# Altium PCB NearFieldProbeSet.PcbDoc (part 1 of 3)
Units mm, origin at the board's own origin, x right, y up, seen from the top; angles counter-clockwise.
Board outline 100 x 100 mm, 6 copper layers (Top Layer, Int1, Int2 (SIG), Int3, Int4, Bottom Layer), stack 1.538 mm thick; 8 components, 12 nets, 232 pads, 4318 vias.
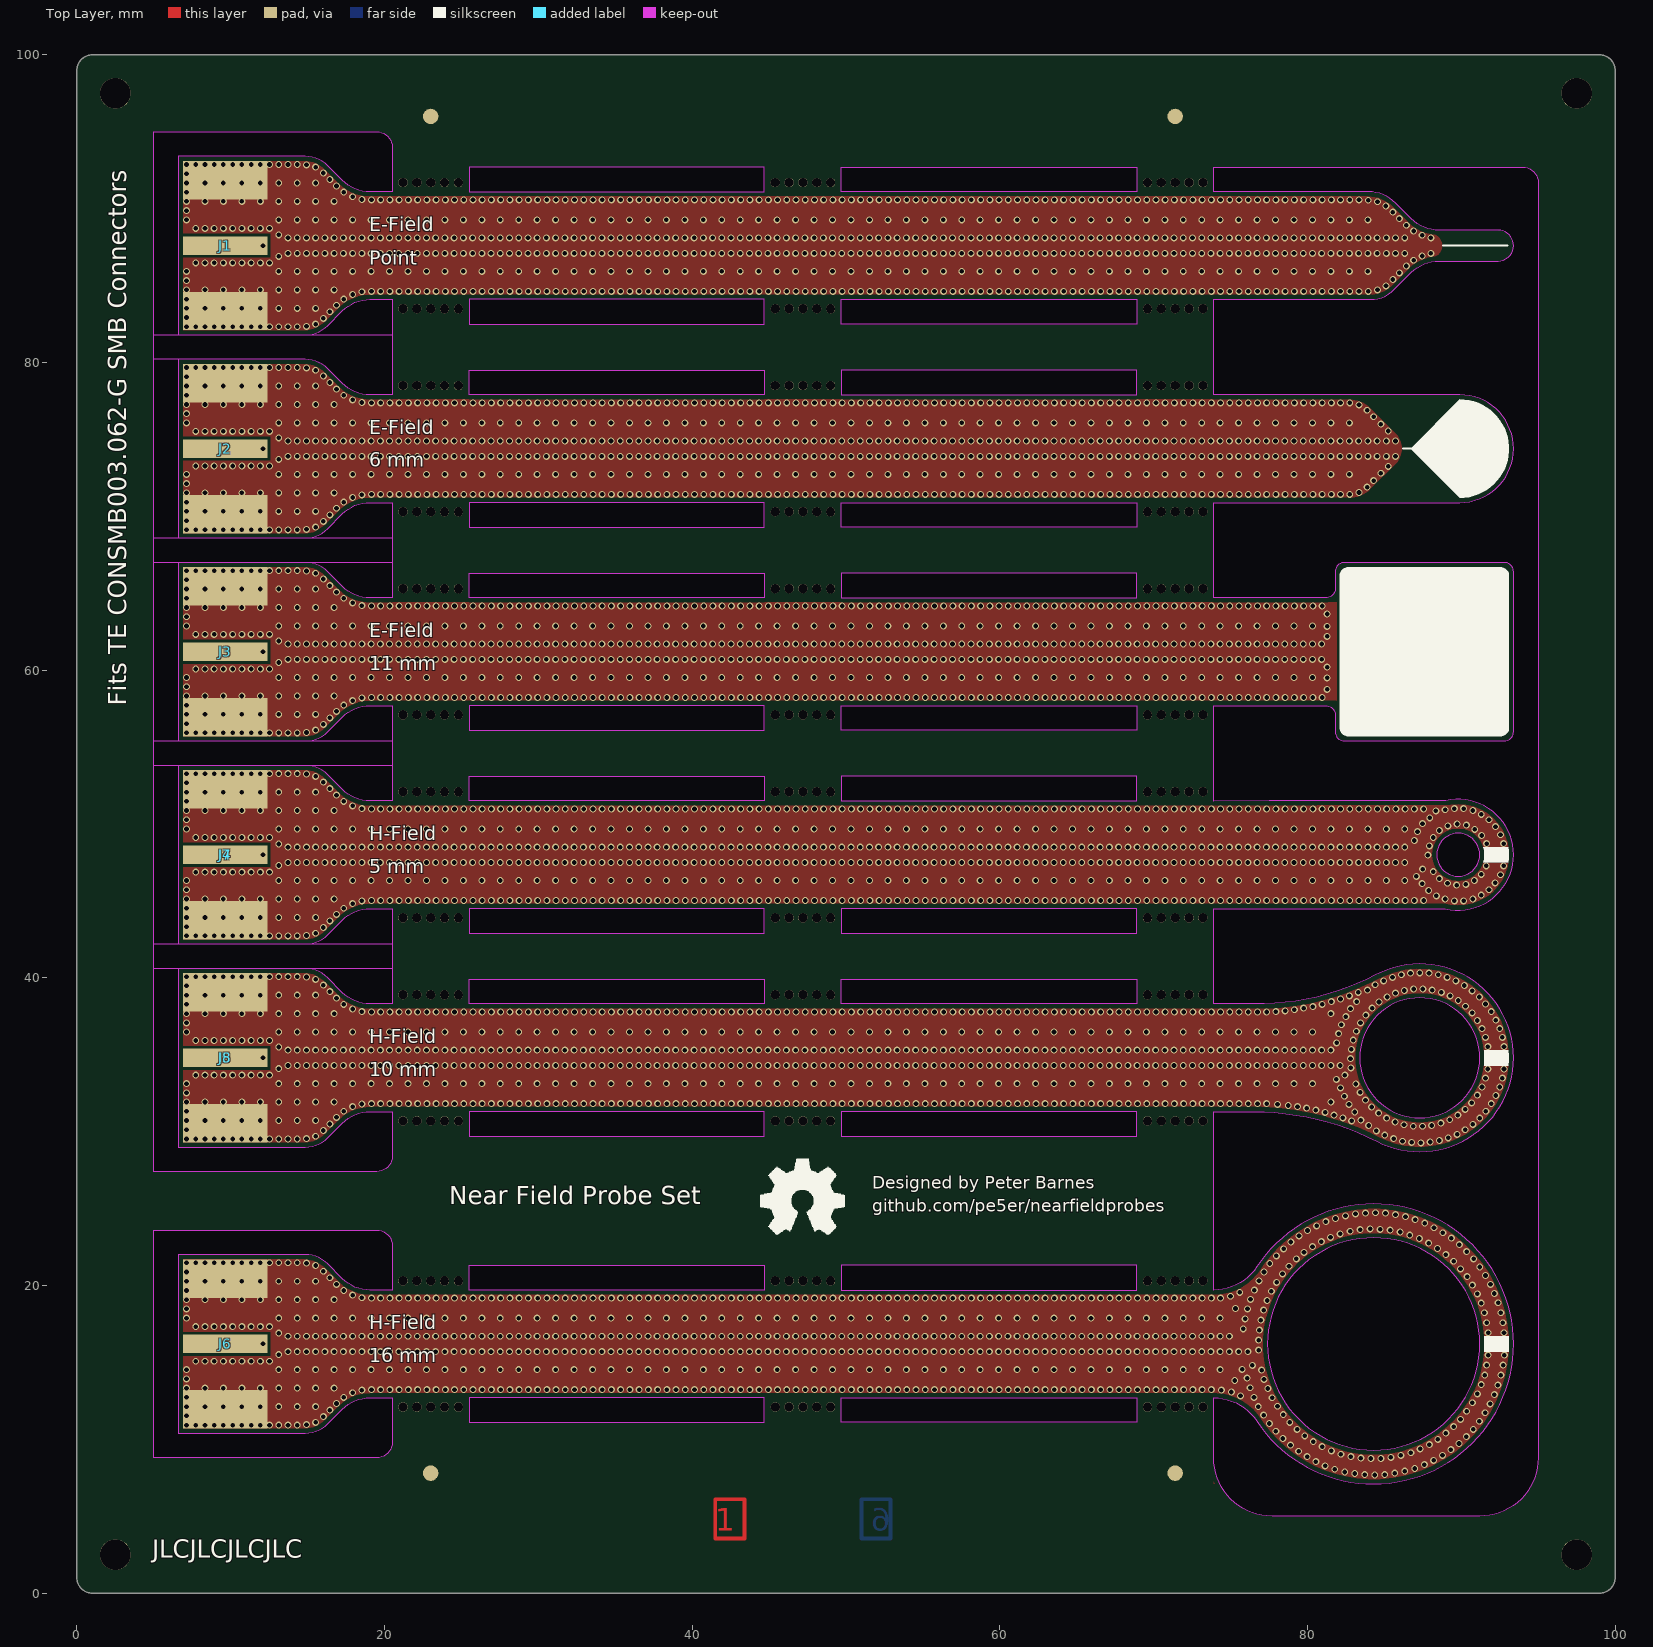
[diagram p0: Top Layer view]
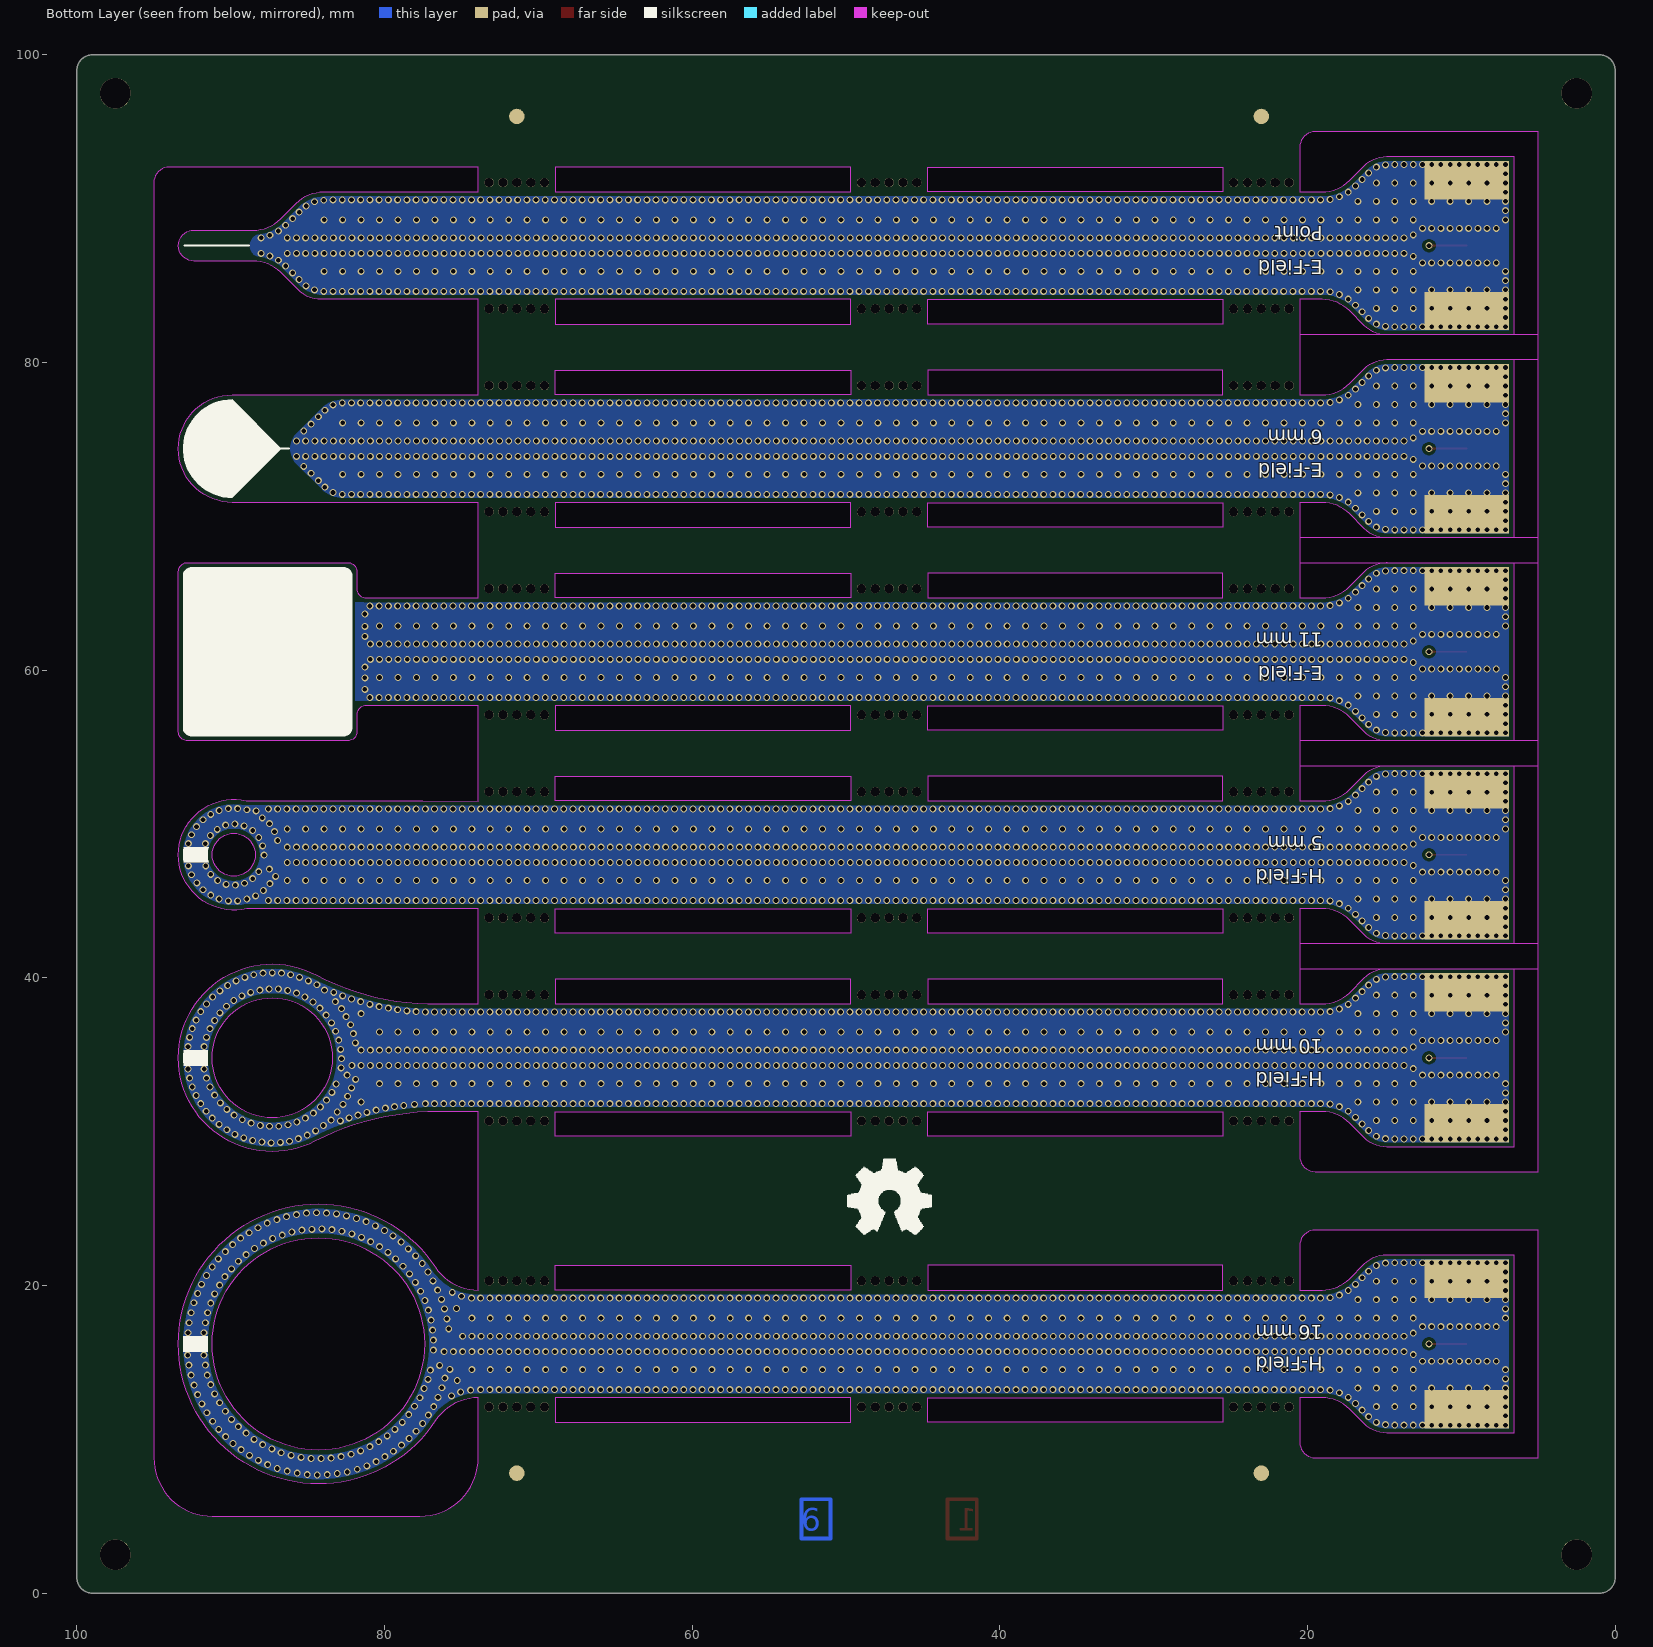
[diagram p1: Bottom Layer view, seen from below]
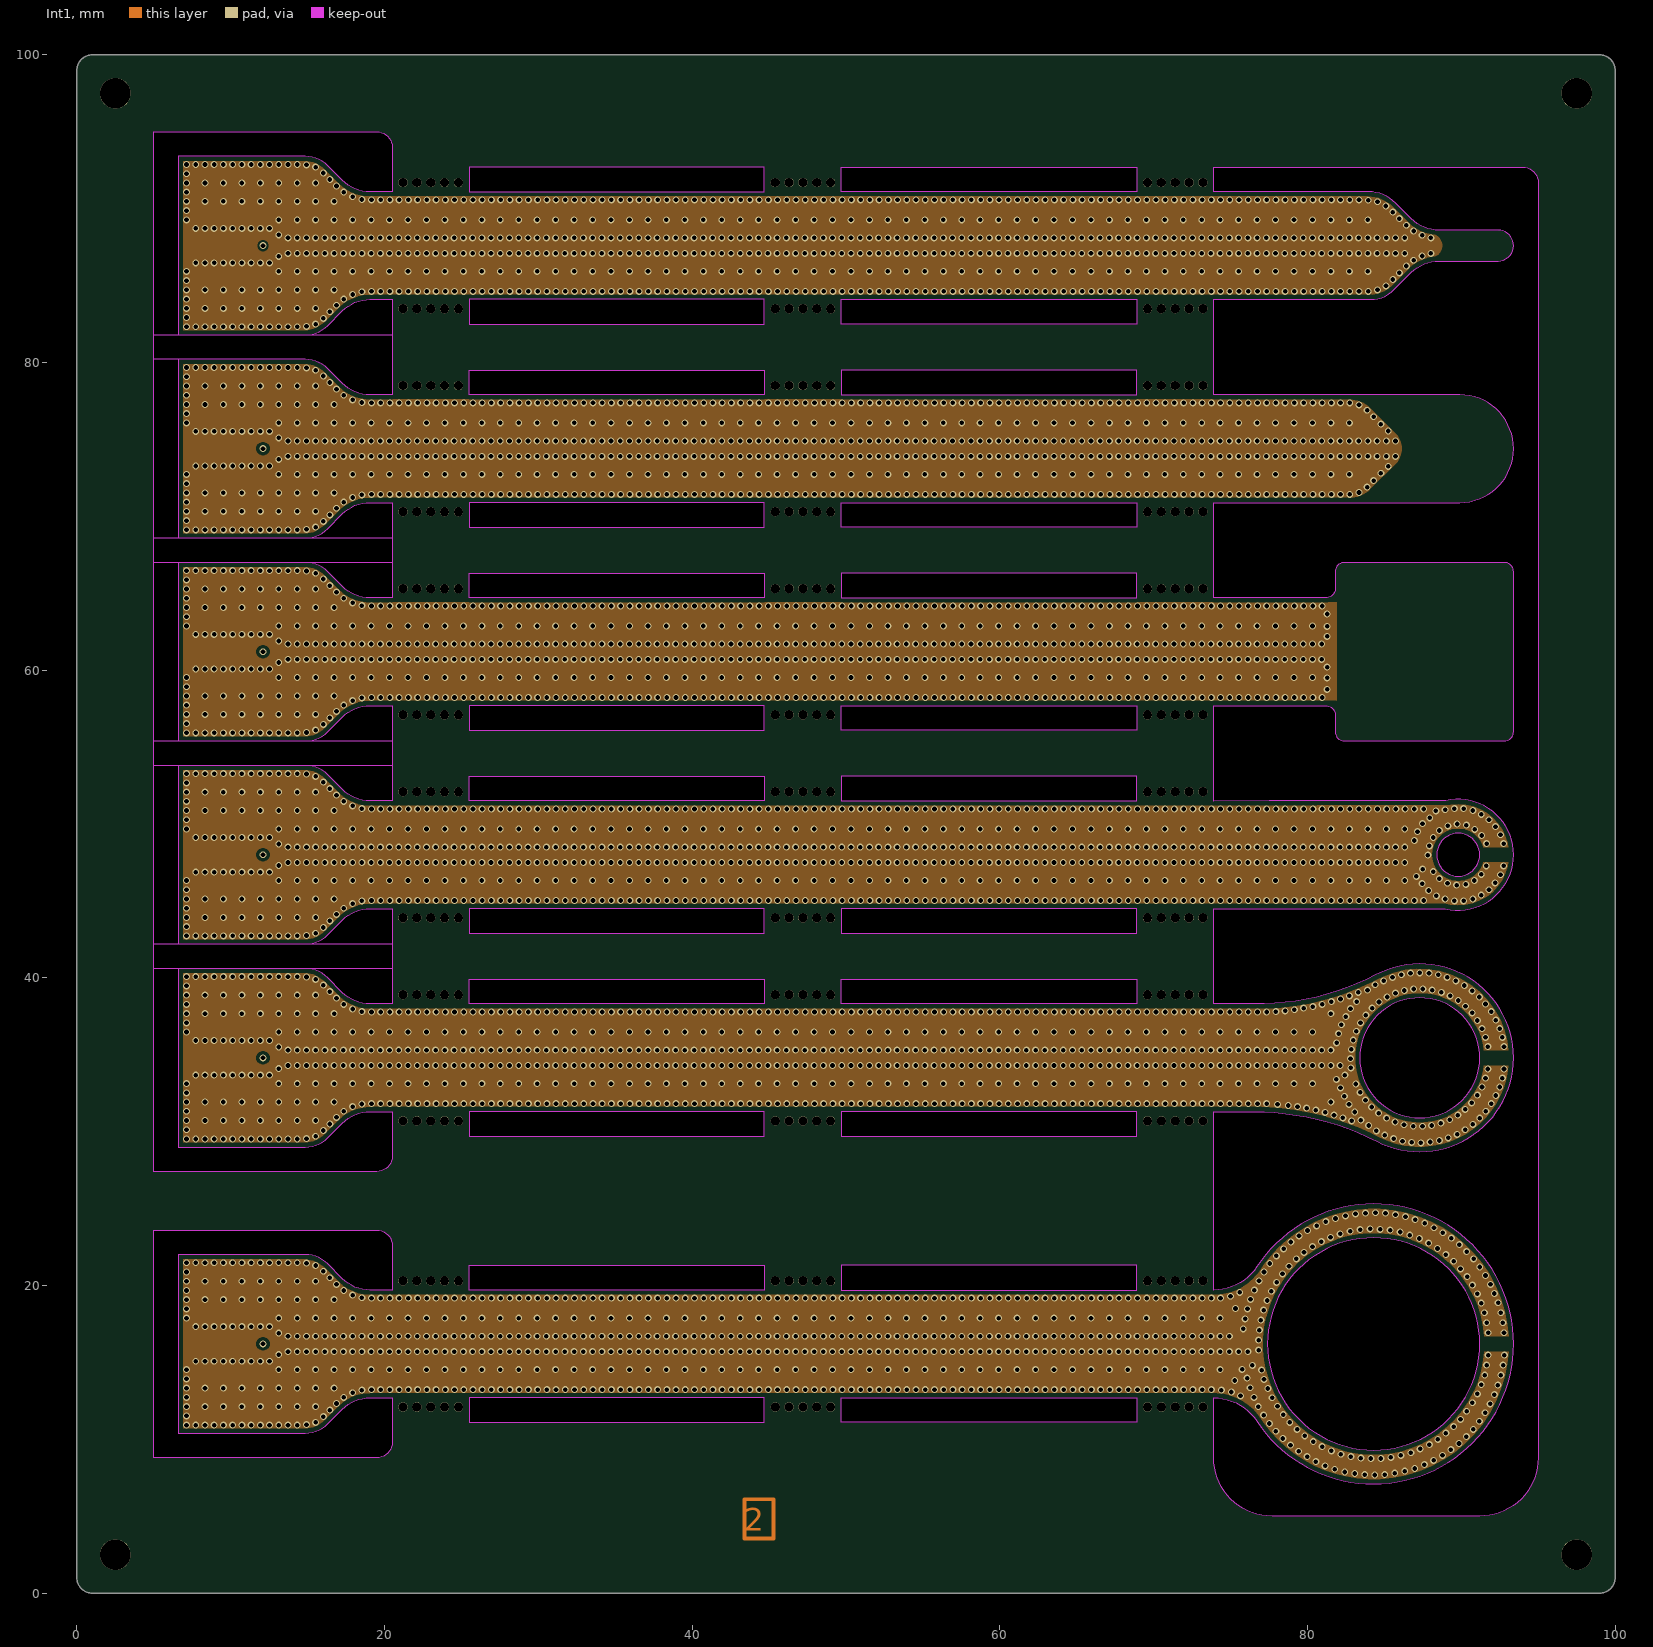
[diagram p2: Int1]
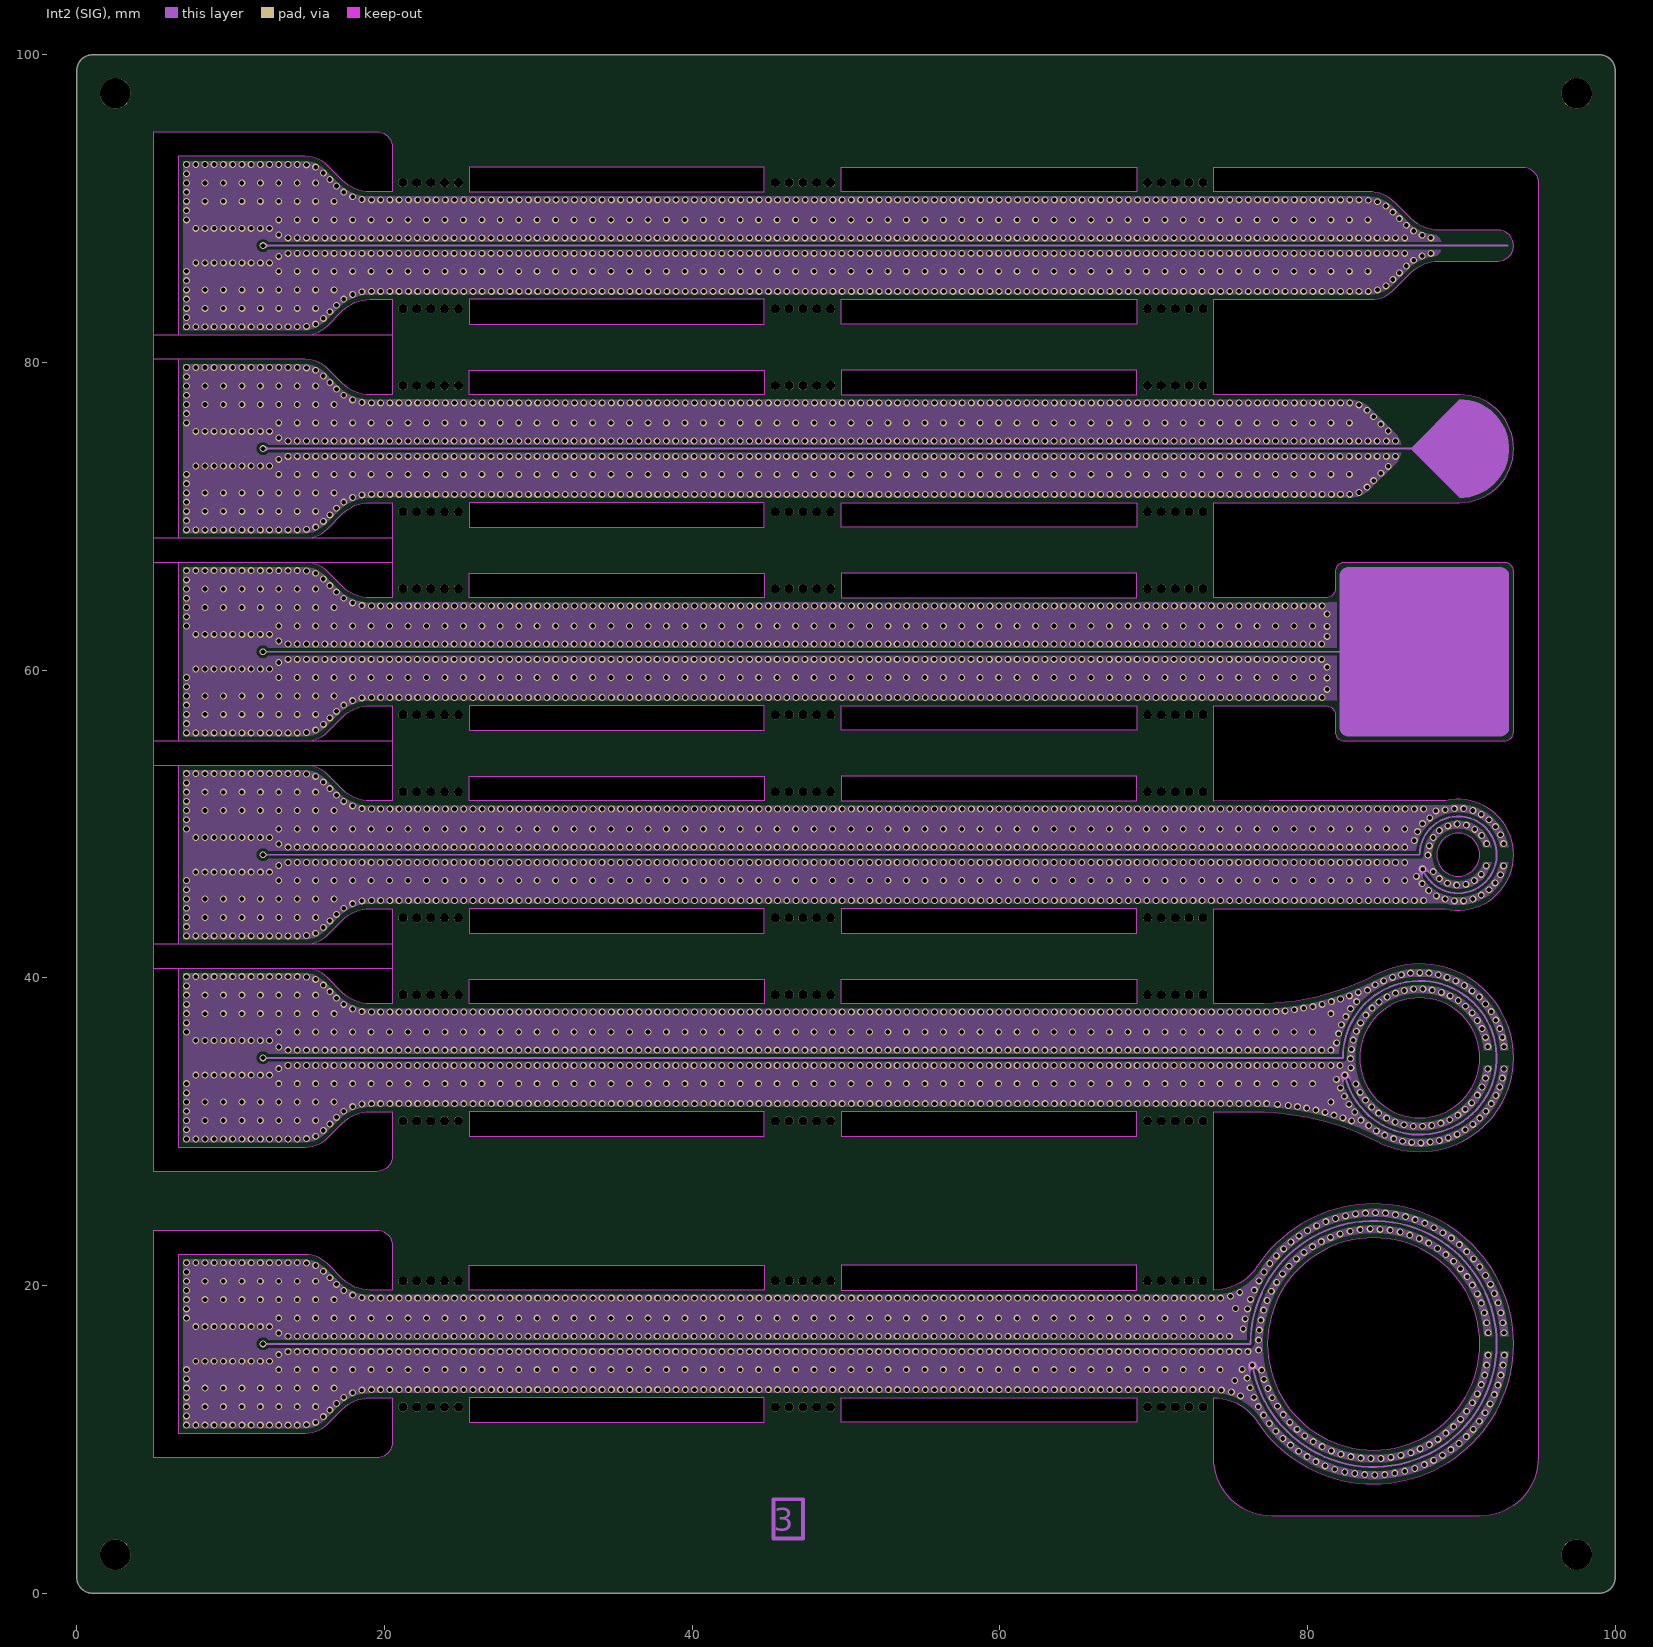
[diagram p3: Int2 (SIG)]
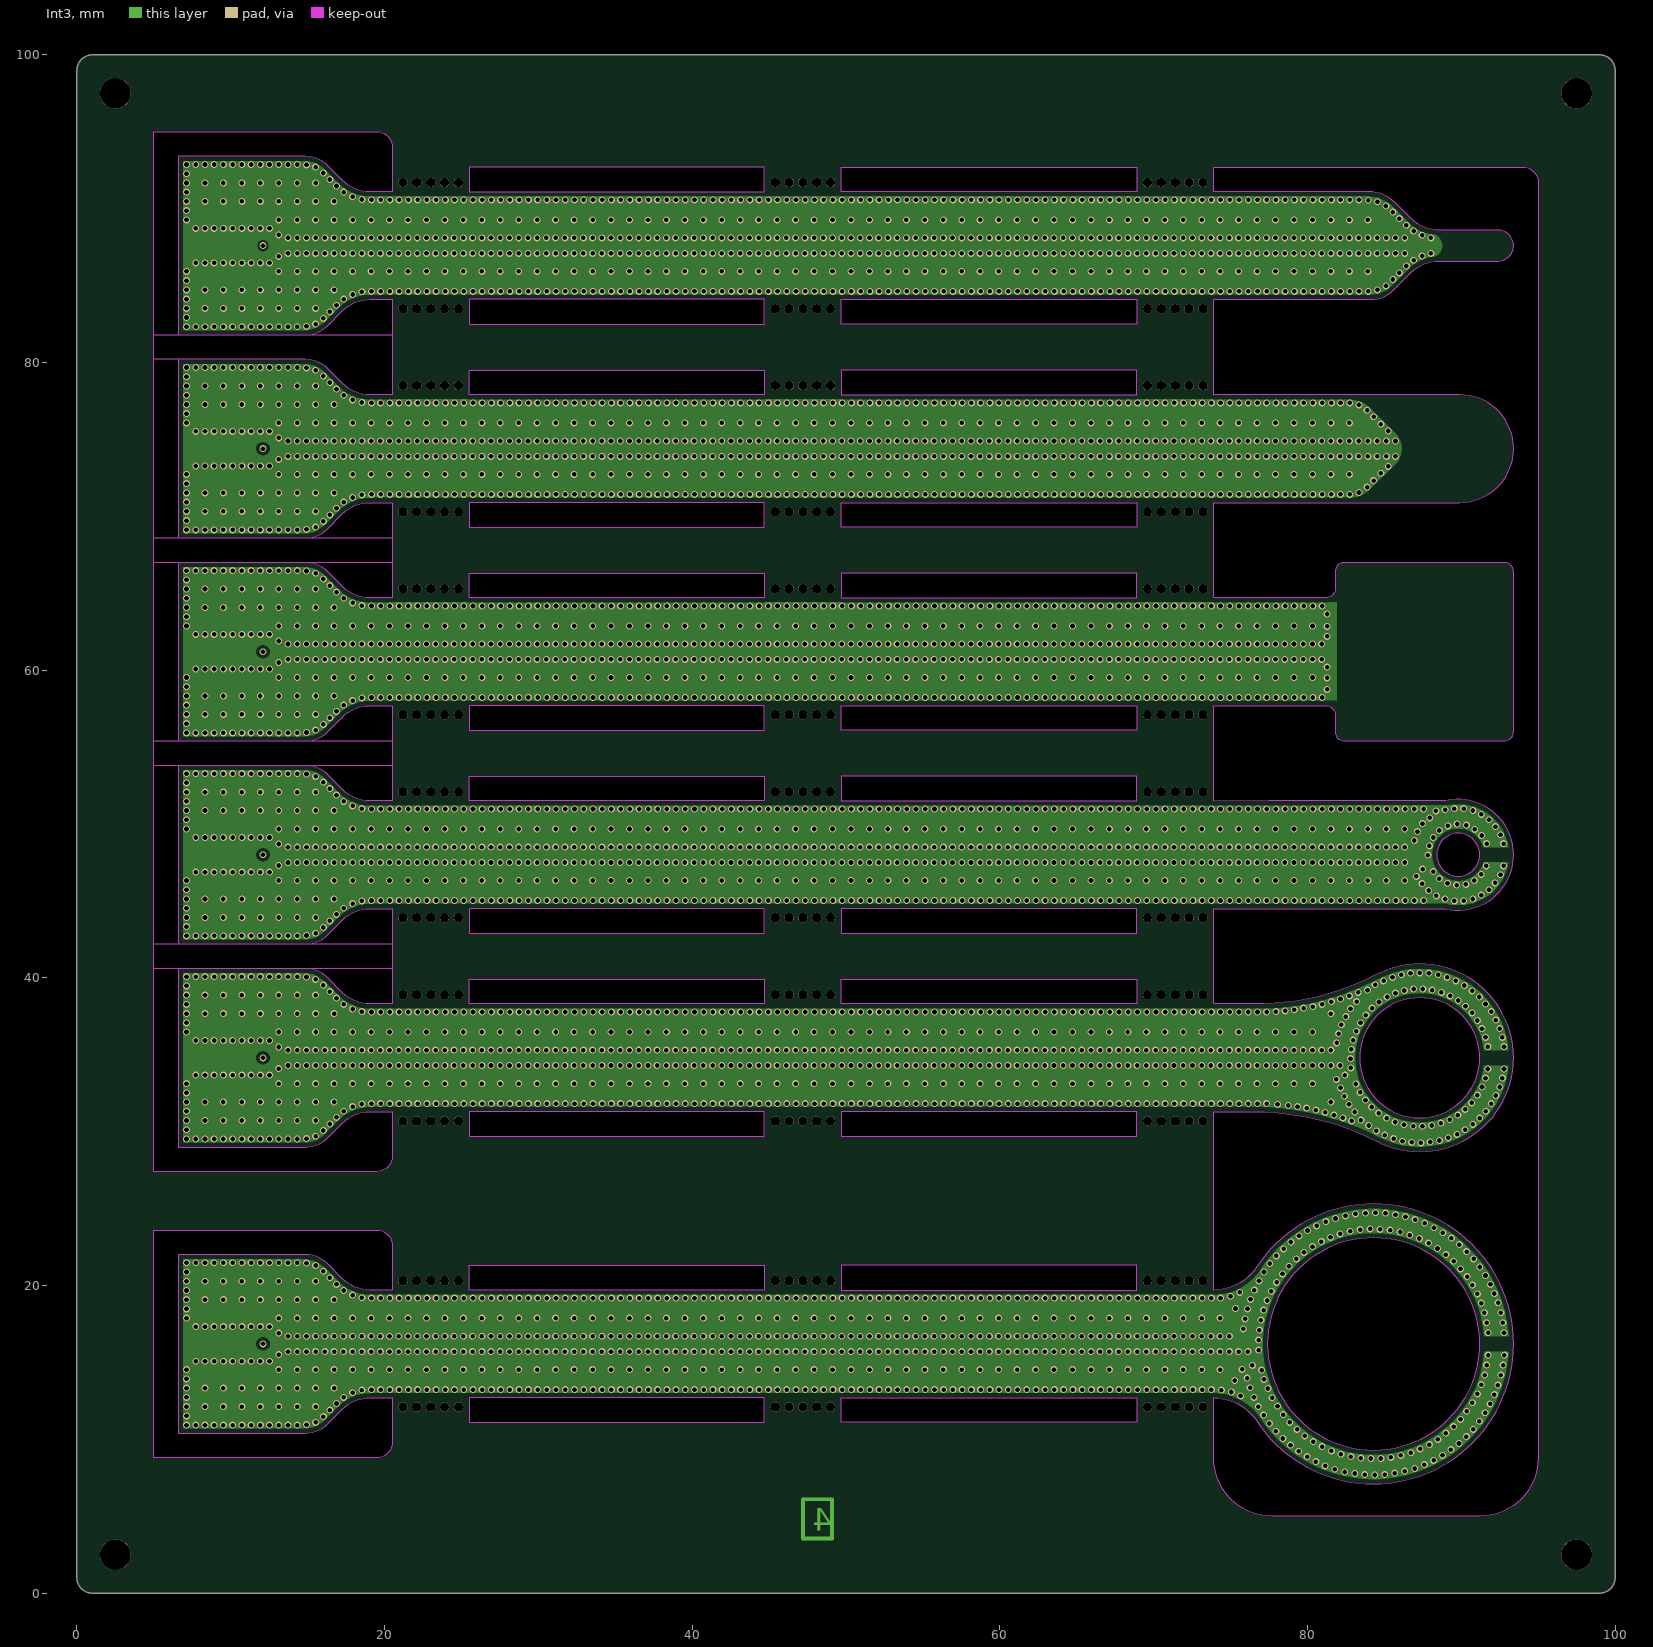
[diagram p4: Int3]
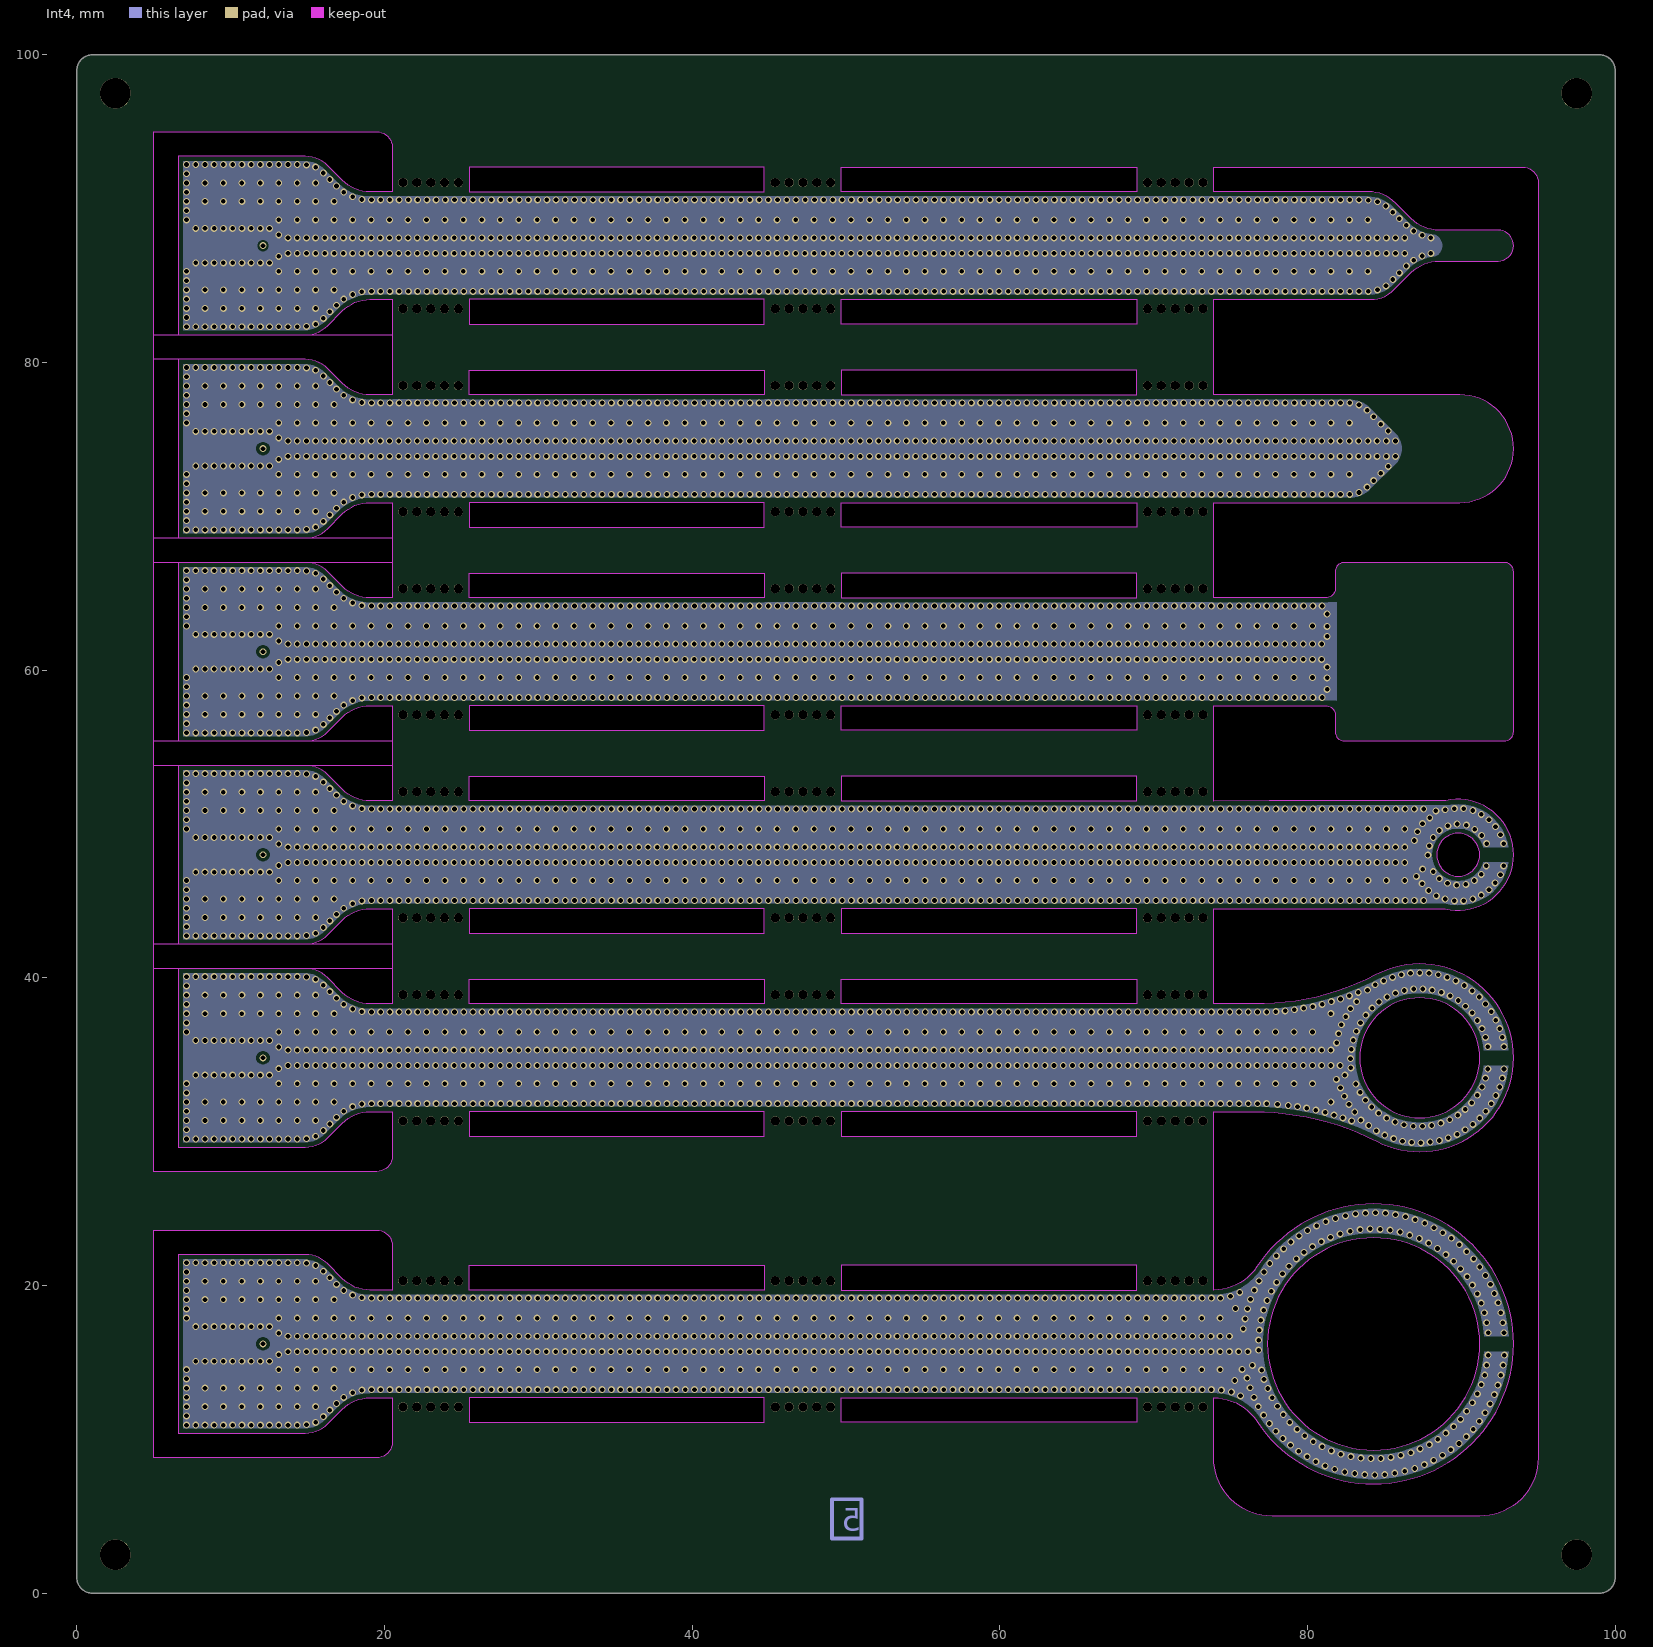
[diagram p5: Int4]
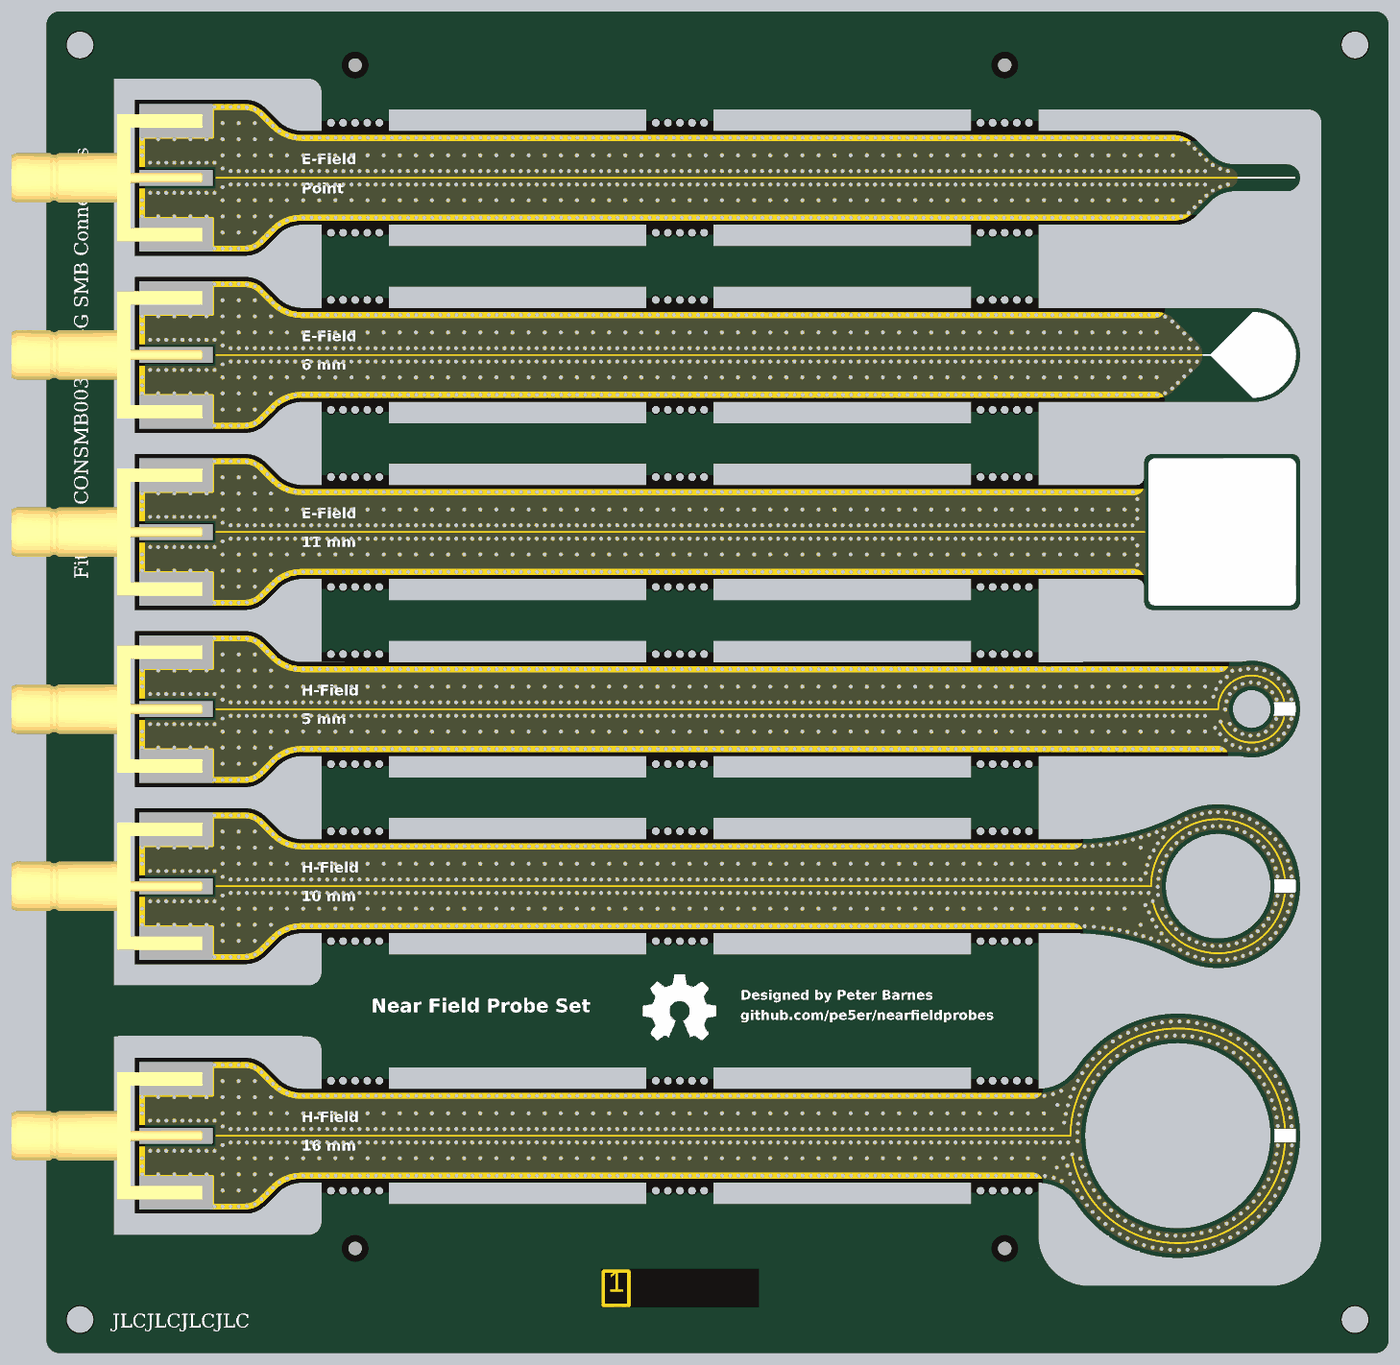
[diagram p8: 3D render of the assembled board from above, using the file's embedded part models]

## Layer stack, top to bottom
Top Solder: solder mask 0.0254, SM-001, Dk 4
Top Layer: signal copper 0.035
Dielectric 2: prepreg 0.0994, PP-015, Dk 4.3
Int1: signal copper 0.0152
Dielectric 3: core 0.55, Core-035, Dk 4.7
Int2 (SIG): signal copper 0.0152
Dielectric 4: prepreg 0.1088, PP-016, Dk 4.4
Int3: signal copper 0.0152
Dielectric 6: core 0.55, Core-035, Dk 4.7
Int4: signal copper 0.0152
Dielectric 7: prepreg 0.0994, PP-015, Dk 4.3
Bottom Layer: signal copper 0.035
Bottom Solder: solder mask 0.0254, SM-001, Dk 4

## Board outline
1,0 cw(c1,1) 0,1 0,99 cw(c1,99) 1,100 99,100 cw(c99,99) 100,99 100,1 cw(c99,1) 99,0
cut-out: 83.9,92.7 94,92.7 cw(c94,91.7) 95,91.7 95,67 95,8.8 cw(c91.2,8.8) 91.2,5 77.7,5 cw(c77.7,8.8) 73.9,8.8 73.9,12.7 cw(c73.9,9.343) 76.703,11.191 ccw(c84.299,16.199) 84.299,7.1 84.3,7.1 ccw(c84.3,16.2) 93.4,16.2 ccw(c84.301,16.2) 84.3,25.3 ccw(c84.3,16.201) 76.704,21.21 cw(c73.9,23.058) 73.9,19.7 73.9,31.3 76.502,31.3 cw(c76.504,13.689) 84.523,29.369 ccw(c87.299,34.796) 87.3,28.7 ccw(c87.3,34.8) 93.4,34.8 ccw(c87.3,34.8) 84.446,40.191 cw(c76.764,54.831) 76.502,38.3 73.9,38.3 73.9,44.5 76.502,44.5 88.973,44.5 ccw(c89.803,48) 93.4,48 ccw(c89.8,48) 88.997,51.509 ccw(c86.849,-609.351) 84.7,51.509 ccw(c81.8,-839.512) 73.9,51.479 73.9,55.4 73.9,57.7 81.2,57.7 cw(c81.2,57.1) 81.8,57.1 81.8,56 ccw(c82.4,56) 82.4,55.4 92.8,55.4 ccw(c92.8,56) 93.4,56 93.4,66.4 ccw(c92.801,66.401) 92.8,67 82.4,67 ccw(c82.4,66.4) 81.8,66.4 81.8,65.3 cw(c81.2,65.3) 81.2,64.7 73.9,64.7 73.9,67 73.9,70.9 89.9,70.9 ccw(c89.9,74.4) 93.4,74.4 ccw(c89.901,74.401) 89.9,77.9 83.9,77.9 73.9,77.9 73.9,84.1 83.9,84.1 84.078,84.1 ccw(c84.078,86.327) 85.652,84.752 86.756,85.856 cw(c88.551,84.063) 88.552,86.6 92.4,86.6 ccw(c92.4,87.6) 93.4,87.6 ccw(c92.401,87.601) 92.4,88.6 88.552,88.6 cw(c88.552,91.139) 86.756,89.344 85.744,90.356 ccw(c83.952,88.57) 83.948,91.1 83.9,91.1 73.9,91.1 73.9,92.7
cut-out: 49.7,38.3 49.7,39.9 68.9,39.9 68.9,38.3
cut-out: 49.7,44.5 49.7,42.9 68.9,42.9 68.9,44.5
cut-out: 49.7,31.3 49.7,29.7 68.9,29.7 68.9,31.3
cut-out: 25.5,31.3 25.5,29.7 44.7,29.7 44.7,31.3
cut-out: 77.4,16.2 ccw(c84.3,16.2) 84.3,9.3 ccw(c84.3,16.2) 91.2,16.2 ccw(c84.3,16.2) 84.3,23.1 ccw(c84.3,16.2)
cut-out: 20.5,22.6 20.5,19.7 19.052,19.7 cw(c19.052,22.24) 17.256,20.444 16.304,21.396 ccw(c14.846,19.939) 14.846,22 6.6,22 6.6,10.4 14.846,10.4 ccw(c14.846,12.462) 16.304,11.004 17.256,11.956 cw(c19.052,10.16) 19.052,12.7 20.5,12.7 20.5,9.8 cw(c19.5,9.8) 19.5,8.8 14.846,8.8 ccw(c14.843,8.794) 14.84,8.8 5,8.8 5,23.6 19.5,23.6 cw(c19.5,22.6)
cut-out: 88.4,48 ccw(c89.8,48) 89.8,46.6 ccw(c89.8,48) 91.2,48 ccw(c89.8,48) 89.8,49.4 ccw(c89.8,48)
cut-out: 83.4,34.8 ccw(c87.3,34.8) 87.3,30.9 ccw(c87.3,34.8) 91.2,34.8 ccw(c87.3,34.8) 87.3,38.7 ccw(c87.3,34.8)
cut-out: 20.5,42.2 20.5,38.3 19.052,38.3 cw(c19.052,40.84) 17.256,39.044 16.304,39.996 ccw(c14.846,38.539) 14.846,40.6 6.6,40.6 6.6,29 14.846,29 ccw(c14.846,31.062) 16.304,29.604 17.256,30.556 cw(c19.052,28.76) 19.052,31.3 20.5,31.3 20.5,28.4 cw(c19.5,28.4) 19.5,27.4 14.846,27.4 ccw(c14.843,27.394) 14.84,27.4 5,27.4 5,42.2
cut-out: 20.5,55.4 20.5,51.5 19.052,51.5 cw(c19.052,54.04) 17.256,52.244 16.304,53.196 ccw(c14.846,51.739) 14.846,53.8 6.6,53.8 6.6,42.2 14.846,42.2 ccw(c14.846,44.262) 16.304,42.804 17.256,43.756 cw(c19.052,41.96) 19.052,44.5 20.5,44.5 20.5,40.6 14.846,40.6 ccw(c14.843,40.594) 14.84,40.6 5,40.6 5,55.4
cut-out: 20.5,68.6 20.5,64.7 19.052,64.7 cw(c19.052,67.24) 17.256,65.444 16.304,66.396 ccw(c14.846,64.939) 14.846,67 6.6,67 6.6,55.4 14.846,55.4 ccw(c14.846,57.462) 16.304,56.004 17.256,56.956 cw(c19.052,55.16) 19.052,57.7 20.5,57.7 20.5,53.8 14.846,53.8 ccw(c14.843,53.794) 14.84,53.8 5,53.8 5,68.6
cut-out: 20.5,81.8 20.5,77.9 19.052,77.9 cw(c19.052,80.44) 17.256,78.644 16.304,79.596 ccw(c14.846,78.139) 14.846,80.2 6.6,80.2 6.6,68.6 14.846,68.6 ccw(c14.846,70.662) 16.304,69.204 17.256,70.156 cw(c19.052,68.36) 19.052,70.9 20.5,70.9 20.5,67 14.846,67 ccw(c14.843,66.993) 14.84,67 5,67 5,81.8
cut-out: 20.5,94 20.5,91.1 19.052,91.1 cw(c19.052,93.64) 17.256,91.844 16.304,92.796 ccw(c14.846,91.338) 14.846,93.4 6.6,93.4 6.6,81.8 14.846,81.8 ccw(c14.846,83.862) 16.304,82.404 17.256,83.356 cw(c19.052,81.56) 19.052,84.1 20.5,84.1 20.5,77.9 19.052,77.9 cw(c19.052,80.44) 17.256,78.644 16.304,79.596 ccw(c14.846,78.139) 14.84,80.2 5,80.2 5,95 19.5,95 cw(c19.5,94)
cut-out: 68.9,12.7 68.9,11.1 49.7,11.1 49.7,12.7
cut-out: 25.5,12.7 25.5,11.1 44.7,11.1 44.7,12.7
cut-out: 68.9,19.7 68.9,21.3 49.7,21.3 49.7,19.7
cut-out: 25.5,19.7 25.5,21.3 44.7,21.3 44.7,19.7
cut-out: 25.5,44.5 25.5,42.9 44.7,42.9 44.7,44.5
cut-out: 25.5,57.7 25.5,56.1 44.7,56.1 44.7,57.7
cut-out: 68.9,57.7 68.9,56.1 49.7,56.1 49.7,57.7
cut-out: 25.5,38.3 25.5,39.9 44.7,39.9 44.7,38.3
cut-out: 25.5,51.5 25.5,53.1 44.7,53.1 44.7,51.5
cut-out: 68.9,51.5 68.9,53.1 49.7,53.1 49.7,51.5
cut-out: 68.9,64.7 68.9,66.3 49.7,66.3 49.7,64.7
cut-out: 25.5,64.7 25.5,66.3 44.7,66.3 44.7,64.7
cut-out: 25.5,70.9 25.5,69.3 44.7,69.3 44.7,70.9
cut-out: 68.9,70.9 68.9,69.3 49.7,69.3 49.7,70.9
cut-out: 68.9,77.9 68.9,79.5 49.7,79.5 49.7,77.9
cut-out: 25.5,77.9 25.5,79.5 44.7,79.5 44.7,77.9
cut-out: 25.5,84.1 25.5,82.5 44.7,82.5 44.7,84.1
cut-out: 68.9,84.1 68.9,82.5 49.7,82.5 49.7,84.1
cut-out: 68.9,92.7 68.9,91.1 49.7,91.1 49.7,92.7
cut-out: 25.5,92.7 25.5,91.1 44.7,91.1 44.7,92.7

## Design rules (kind name [scope] priority, off if disabled: settings)
AcuteAngle [All] p1: minimum=6.00000000000000E+0001 checktracksonly=TRUE
BackDrilling BackDrilling_GBE [InDifferentialPairClass('GBE')] p1: maxstublength=2.032 usetopbackdrill=TRUE usebottombackdrill=TRUE holeoversize=0.025 holetolplus=0 holetolminus=0
BackDrilling BackDrilling_SATA_GEN_1 [InDifferentialPairClass('SATA_GEN_1')] p2: maxstublength=2.032 usetopbackdrill=TRUE usebottombackdrill=TRUE holeoversize=0.025 holetolplus=0 holetolminus=0
BackDrilling BackDrilling_SATA_GEN_2 [InDifferentialPairClass('SATA_GEN_2')] p3: maxstublength=2.032 usetopbackdrill=TRUE usebottombackdrill=TRUE holeoversize=0.025 holetolplus=0 holetolminus=0
BackDrilling BackDrilling_SATA_GEN_3 [InDifferentialPairClass('SATA_GEN_3')] p4: maxstublength=2.032 usetopbackdrill=TRUE usebottombackdrill=TRUE holeoversize=0.025 holetolplus=0 holetolminus=0
BackDrilling BackDrilling_PCIE_GEN_3 [InDifferentialPairClass('PCIE_GEN_3')] p5: maxstublength=2.032 usetopbackdrill=TRUE usebottombackdrill=TRUE holeoversize=0.025 holetolplus=0 holetolminus=0
BackDrilling BackDrilling_PCIE_GEN_4 [InDifferentialPairClass('PCIE_GEN_4')] p6: maxstublength=0.762 usetopbackdrill=TRUE usebottombackdrill=TRUE holeoversize=0.025 holetolplus=0 holetolminus=0
BackDrilling BackDrilling_PCIE_GEN_5 [InDifferentialPairClass('PCIE_GEN_5')] p7: maxstublength=0.254 usetopbackdrill=TRUE usebottombackdrill=TRUE holeoversize=0.025 holetolplus=0 holetolminus=0
BackDrilling BackDrilling_USB_2.0 [InDifferentialPairClass('USB_2.0')] p8: maxstublength=2.032 usetopbackdrill=TRUE usebottombackdrill=TRUE holeoversize=0.025 holetolplus=0 holetolminus=0
BackDrilling BackDrilling_USB_3.2_GEN_1 [InDifferentialPairClass('USB_3.2_GEN_1')] p9: maxstublength=2.032 usetopbackdrill=TRUE usebottombackdrill=TRUE holeoversize=0.025 holetolplus=0 holetolminus=0
BackDrilling BackDrilling_USB_3.2_GEN_2 [InDifferentialPairClass('USB_3.2_GEN_2')] p10: maxstublength=0.762 usetopbackdrill=TRUE usebottombackdrill=TRUE holeoversize=0.025 holetolplus=0 holetolminus=0
BackDrilling BackDrilling_USB_4_GEN_2 [InDifferentialPairClass('USB_4_GEN_2')] p11: maxstublength=0.762 usetopbackdrill=TRUE usebottombackdrill=TRUE holeoversize=0.025 holetolplus=0 holetolminus=0
BackDrilling BackDrilling_USB_4_GEN_3 [InDifferentialPairClass('USB_4_GEN_3')] p12: maxstublength=0.254 usetopbackdrill=TRUE usebottombackdrill=TRUE holeoversize=0.025 holetolplus=0 holetolminus=0
BackDrilling BackDrilling_DP_1.2 [InDifferentialPairClass('DP_1.2')] p13: maxstublength=2.032 usetopbackdrill=TRUE usebottombackdrill=TRUE holeoversize=0.025 holetolplus=0 holetolminus=0
BackDrilling BackDrilling_DP_1.4 [InDifferentialPairClass('DP_1.4')] p14: maxstublength=0.762 usetopbackdrill=TRUE usebottombackdrill=TRUE holeoversize=0.025 holetolplus=0 holetolminus=0
BackDrilling BackDrilling_DP_2.0 [InDifferentialPairClass('DP_2.0')] p15: maxstublength=0.254 usetopbackdrill=TRUE usebottombackdrill=TRUE holeoversize=0.025 holetolplus=0 holetolminus=0
BackDrilling BackDrilling_HDMI_1.4 [InDifferentialPairClass('HDMI_1.4')] p16: maxstublength=2.032 usetopbackdrill=TRUE usebottombackdrill=TRUE holeoversize=0.025 holetolplus=0 holetolminus=0
BackDrilling BackDrilling_HDMI_2.1 [InDifferentialPairClass('HDMI_2.1')] p17: maxstublength=0.762 usetopbackdrill=TRUE usebottombackdrill=TRUE holeoversize=0.025 holetolplus=0 holetolminus=0
BoardOutlineClearance [Not (OnLayer('Top Overlay'))] p1: gap=0.3 ignorepadtopadclearanceinfootprint=FALSE
Clearance Clearance_BGA [TouchesRoom('Room_BGA_Fanout')] p1 off: gap=0.1 ignorepadtopadclearanceinfootprint=FALSE // Allows for necking tracks between BGA pads
Clearance Clearance_Polygon_To_Polygon [InPolygon vs InPolygon] p2: gap=0.3 ignorepadtopadclearanceinfootprint=FALSE // Clearance between polygons of different nets
Clearance Clearance_Polygon_To_All [InPolygon] p3: gap=0.2 ignorepadtopadclearanceinfootprint=FALSE // Clearance between polygons and other objects
Clearance Clearance_Mounting_Holes [InComponentClass('Mounting_Holes')] p4 off: gap=0.5 ignorepadtopadclearanceinfootprint=FALSE // large clearance around mounting holes that are in the Mounting_Holes component class (use a blanket on the schematic to specify this)
Clearance Clearance_Diff_Pair_Via [IsDifferentialPair AND (IsVia Or IsPad)] p5 off: gap=0.1 ignorepadtopadclearanceinfootprint=FALSE // should allow pads and vias on diff pairs to be as close as possible to each other, so that their anti-pads touch for tighter impedance control
Clearance Clearance_Default [All] p6: gap=0.2 ignorepadtopadclearanceinfootprint=TRUE
DiffPairsRouting Diff_PCIE [InDifferentialPairClass('PCIE*')] p1: maxlimit=0.127 minlimit=0.127 mostfreqgap=0.127 toplayer_minwidth=0.328 toplayer_maxwidth=0.328 toplayer_prefwidth=0.328 midlayer1_minwidth=0.381 midlayer1_maxwidth=0.381 midlayer1_prefwidth=0.381 midlayer2_minwidth=0.381 midlayer2_maxwidth=0.381 midlayer2_prefwidth=0.381 midlayer3_minwidth=0.381 midlayer3_maxwidth=0.381 midlayer3_prefwidth=0.381 midlayer4_minwidth=0.381 midlayer4_maxwidth=0.381 midlayer4_prefwidth=0.381 bottomlayer_minwidth=0.328 bottomlayer_maxwidth=0.328 bottomlayer_prefwidth=0.328 impedanceprofiledriven=TRUE maxuncoupledlength=12.7
DiffPairsRouting Diff_SATA [InDifferentialPairClass('SATA*')] p2: maxlimit=0.127 minlimit=0.127 mostfreqgap=0.127 toplayer_minwidth=0.328 toplayer_maxwidth=0.328 toplayer_prefwidth=0.328 midlayer1_minwidth=0.381 midlayer1_maxwidth=0.381 midlayer1_prefwidth=0.381 midlayer2_minwidth=0.381 midlayer2_maxwidth=0.381 midlayer2_prefwidth=0.381 midlayer3_minwidth=0.381 midlayer3_maxwidth=0.381 midlayer3_prefwidth=0.381 midlayer4_minwidth=0.381 midlayer4_maxwidth=0.381 midlayer4_prefwidth=0.381 bottomlayer_minwidth=0.328 bottomlayer_maxwidth=0.328 bottomlayer_prefwidth=0.328 impedanceprofiledriven=TRUE maxuncoupledlength=12.7
DiffPairsRouting Diff_HDMI [InDifferentialPairClass('HDMI*')] p3: maxlimit=0.127 minlimit=0.127 mostfreqgap=0.127 toplayer_minwidth=0.328 toplayer_maxwidth=0.328 toplayer_prefwidth=0.328 midlayer1_minwidth=0.381 midlayer1_maxwidth=0.381 midlayer1_prefwidth=0.381 midlayer2_minwidth=0.381 midlayer2_maxwidth=0.381 midlayer2_prefwidth=0.381 midlayer3_minwidth=0.381 midlayer3_maxwidth=0.381 midlayer3_prefwidth=0.381 midlayer4_minwidth=0.381 midlayer4_maxwidth=0.381 midlayer4_prefwidth=0.381 bottomlayer_minwidth=0.328 bottomlayer_maxwidth=0.328 bottomlayer_prefwidth=0.328 impedanceprofiledriven=TRUE maxuncoupledlength=12.7
DiffPairsRouting Diff_USB_2.0 [InDifferentialPairClass('USB_2.0*')] p4: maxlimit=0.127 minlimit=0.127 mostfreqgap=0.127 toplayer_minwidth=0.279 toplayer_maxwidth=0.279 toplayer_prefwidth=0.279 midlayer1_minwidth=0.381 midlayer1_maxwidth=0.381 midlayer1_prefwidth=0.381 midlayer2_minwidth=0.381 midlayer2_maxwidth=0.381 midlayer2_prefwidth=0.381 midlayer3_minwidth=0.381 midlayer3_maxwidth=0.381 midlayer3_prefwidth=0.381 midlayer4_minwidth=0.381 midlayer4_maxwidth=0.381 midlayer4_prefwidth=0.381 bottomlayer_minwidth=0.279 bottomlayer_maxwidth=0.279 bottomlayer_prefwidth=0.279 impedanceprofiledriven=TRUE maxuncoupledlength=12.7
DiffPairsRouting Diff_USB_3.2 [InDifferentialPairClass('USB_3*')] p5: maxlimit=0.127 minlimit=0.127 mostfreqgap=0.127 toplayer_minwidth=0.328 toplayer_maxwidth=0.328 toplayer_prefwidth=0.328 midlayer1_minwidth=0.381 midlayer1_maxwidth=0.381 midlayer1_prefwidth=0.381 midlayer2_minwidth=0.381 midlayer2_maxwidth=0.381 midlayer2_prefwidth=0.381 midlayer3_minwidth=0.381 midlayer3_maxwidth=0.381 midlayer3_prefwidth=0.381 midlayer4_minwidth=0.381 midlayer4_maxwidth=0.381 midlayer4_prefwidth=0.381 bottomlayer_minwidth=0.328 bottomlayer_maxwidth=0.328 bottomlayer_prefwidth=0.328 impedanceprofiledriven=TRUE maxuncoupledlength=12.7
DiffPairsRouting Diff_GBE [InDifferentialPairClass('GBE*')] p6: maxlimit=0.127 minlimit=0.127 mostfreqgap=0.127 toplayer_minwidth=0.197 toplayer_maxwidth=0.197 toplayer_prefwidth=0.197 midlayer1_minwidth=0.381 midlayer1_maxwidth=0.381 midlayer1_prefwidth=0.381 midlayer2_minwidth=0.381 midlayer2_maxwidth=0.381 midlayer2_prefwidth=0.381 midlayer3_minwidth=0.381 midlayer3_maxwidth=0.381 midlayer3_prefwidth=0.381 midlayer4_minwidth=0.381 midlayer4_maxwidth=0.381 midlayer4_prefwidth=0.381 bottomlayer_minwidth=0.197 bottomlayer_maxwidth=0.197 bottomlayer_prefwidth=0.197 impedanceprofiledriven=TRUE maxuncoupledlength=12.7
DiffPairsRouting Diff_DP [InDifferentialPairClass('DP*')] p7: maxlimit=0.127 minlimit=0.127 mostfreqgap=0.127 toplayer_minwidth=0.328 toplayer_maxwidth=0.328 toplayer_prefwidth=0.328 midlayer1_minwidth=0.381 midlayer1_maxwidth=0.381 midlayer1_prefwidth=0.381 midlayer2_minwidth=0.381 midlayer2_maxwidth=0.381 midlayer2_prefwidth=0.381 midlayer3_minwidth=0.381 midlayer3_maxwidth=0.381 midlayer3_prefwidth=0.381 midlayer4_minwidth=0.381 midlayer4_maxwidth=0.381 midlayer4_prefwidth=0.381 bottomlayer_minwidth=0.328 bottomlayer_maxwidth=0.328 bottomlayer_prefwidth=0.328 impedanceprofiledriven=TRUE maxuncoupledlength=12.7
Height [All] p1: minheight=0 maxheight=100 prefheight=12.7
HoleSize [All] p1: absolutevalues=TRUE maxlimit=5 minlimit=0.2 maxpercent=80.000 minpercent=20.000
HoleToHoleClearance [All] p1: gap=0.3 allowstackedmicrovias=TRUE
MatchedLengths Matched_xSiganls_PCIE_Pair [InxSignalClass('PCIE')] p1: tolerance=0.064 checknetsindiffpair=TRUE checkdiffpairvsdiffpair=FALSE checkxsignals=FALSE checkothers=FALSE
MatchedLengths Matched_xSignals_SATA_Pair [InxSignalClass('SATA')] p2: tolerance=0.064 checknetsindiffpair=TRUE checkdiffpairvsdiffpair=FALSE checkxsignals=FALSE checkothers=FALSE
MatchedLengths Matched_xSignals_HDMI_Pair [InxSignalClass('HDMI*')] p3: tolerance=0.064 checknetsindiffpair=TRUE checkdiffpairvsdiffpair=FALSE checkxsignals=FALSE checkothers=FALSE
MatchedLengths Matched_xSignals_USB_2.0_Pair [InxSignalClass('USB_2.0')] p4: tolerance=0.508 checknetsindiffpair=TRUE checkdiffpairvsdiffpair=FALSE checkxsignals=FALSE checkothers=FALSE
MatchedLengths Matched_xSignals_USB_3.2_Pair [InxSignalClass('USB_3*')] p5: tolerance=0.064 checknetsindiffpair=TRUE checkdiffpairvsdiffpair=FALSE checkxsignals=FALSE checkothers=FALSE
MatchedLengths Matched_xSignals_GBE_Pair [InxSignalClass('GBE*')] p6: tolerance=0.064 checknetsindiffpair=TRUE checkdiffpairvsdiffpair=FALSE checkxsignals=FALSE checkothers=FALSE
MatchedLengths Matched_xSignals_DP_Pair [InxSignalClass('DP*')] p7: tolerance=0.064 checknetsindiffpair=TRUE checkdiffpairvsdiffpair=FALSE checkxsignals=FALSE checkothers=FALSE
MatchedLengths Matched_PCIE_Pair [InDifferentialPairClass('PCIE*') AND NOT InDifferentialPairClass('xSignals')] p8: tolerance=0.064 checknetsindiffpair=TRUE checkdiffpairvsdiffpair=FALSE checkxsignals=FALSE checkothers=FALSE // sets pair length matching requirements for PCIE, exluding any nets which are part of xSignals
MatchedLengths Matched_SATA_Pair [InDifferentialPairClass('SATA*') AND NOT InDifferentialPairClass('xSignals')] p9: tolerance=0.064 checknetsindiffpair=TRUE checkdiffpairvsdiffpair=FALSE checkxsignals=FALSE checkothers=FALSE // sets pair length matching requirements for SATA exluding any nets which are part of xSignals
MatchedLengths Matched_HDMI_Pair [InDifferentialPairClass('HDMI*') AND NOT InDifferentialPairClass('xSignals')] p10: tolerance=0.064 checknetsindiffpair=TRUE checkdiffpairvsdiffpair=FALSE checkxsignals=FALSE checkothers=FALSE // sets pair length matching requirements for HDMI exluding any nets which are part of xSignals
MatchedLengths Matched_HDMI0_Group [InDifferentialPairClass('HDMI0')] p11: tolerance=2.54 checknetsindiffpair=FALSE checkdiffpairvsdiffpair=TRUE checkxsignals=TRUE checkothers=TRUE
MatchedLengths Matched_HDMI1_Group [InDifferentialPairClass('HDMI1')] p12: tolerance=2.54 checknetsindiffpair=FALSE checkdiffpairvsdiffpair=TRUE checkxsignals=TRUE checkothers=TRUE
MatchedLengths Matched_HDMI2_Group [InDifferentialPairClass('HDMI2')] p13: tolerance=2.54 checknetsindiffpair=FALSE checkdiffpairvsdiffpair=TRUE checkxsignals=TRUE checkothers=TRUE
MatchedLengths Matched_HDMI3_Group [InDifferentialPairClass('HDMI3')] p14: tolerance=2.54 checknetsindiffpair=FALSE checkdiffpairvsdiffpair=TRUE checkxsignals=TRUE checkothers=TRUE
MatchedLengths Matched_USB_2.0_Pair [InDifferentialPairClass('USB_2.0') AND NOT InDifferentialPairClass('xSignals')] p15: tolerance=0.508 checknetsindiffpair=TRUE checkdiffpairvsdiffpair=FALSE checkxsignals=FALSE checkothers=FALSE // sets pair length matching requirements for USB 2.0 exluding any nets which are part of xSignals
MatchedLengths Matched_USB_3.2_Pair [InDifferentialPairClass('USB_3*') AND NOT InDifferentialPairClass('xSignals')] p16: tolerance=0.064 checknetsindiffpair=TRUE checkdiffpairvsdiffpair=FALSE checkxsignals=FALSE checkothers=FALSE // sets pair length matching requirements for USB 3.x exluding any nets which are part of xSignals
MatchedLengths Matched_GBE_Pair [InDifferentialPairClass('GBE*') AND NOT InDifferentialPairClass('xSignals')] p17: tolerance=0.127 checknetsindiffpair=TRUE checkdiffpairvsdiffpair=FALSE checkxsignals=FALSE checkothers=FALSE // sets pair length matching requirements for GBE exluding any nets which are part of xSignals
MatchedLengths Matched_GBE0_Group [InDifferentialPairClass('GBE0')] p18: tolerance=12.7 checknetsindiffpair=FALSE checkdiffpairvsdiffpair=TRUE checkxsignals=TRUE checkothers=TRUE
MatchedLengths Matched_GBE1_Group [InDifferentialPairClass('GBE1')] p19: tolerance=12.7 checknetsindiffpair=FALSE checkdiffpairvsdiffpair=TRUE checkxsignals=TRUE checkothers=TRUE
MatchedLengths Matched_GBE2_Group [InDifferentialPairClass('GBE2')] p20: tolerance=12.7 checknetsindiffpair=FALSE checkdiffpairvsdiffpair=TRUE checkxsignals=TRUE checkothers=TRUE
MatchedLengths Matched_GBE3_Group [InDifferentialPairClass('GBE3')] p21: tolerance=12.7 checknetsindiffpair=FALSE checkdiffpairvsdiffpair=TRUE checkxsignals=TRUE checkothers=TRUE
MatchedLengths Matched_DP_Pair [InDifferentialPairClass('DP*') AND NOT InDifferentialPairClass('xSignals')] p22: tolerance=0.064 checknetsindiffpair=TRUE checkdiffpairvsdiffpair=FALSE checkxsignals=FALSE checkothers=FALSE // sets pair length matching requirements for DP exluding any nets which are part of xSignals
MatchedLengths Matched_DP0_Group [InDifferentialPairClass('DP0')] p23: tolerance=2.54 checknetsindiffpair=FALSE checkdiffpairvsdiffpair=TRUE checkxsignals=TRUE checkothers=TRUE
MatchedLengths Matched_DP1_Group [InDifferentialPairClass('DP1')] p24: tolerance=2.54 checknetsindiffpair=FALSE checkdiffpairvsdiffpair=TRUE checkxsignals=TRUE checkothers=TRUE
MatchedLengths Matched_DP2_Group [InDifferentialPairClass('DP2')] p25: tolerance=2.54 checknetsindiffpair=FALSE checkdiffpairvsdiffpair=TRUE checkxsignals=TRUE checkothers=TRUE
MatchedLengths Matched_DP3_Group [InDifferentialPairClass('DP3')] p26: tolerance=2.54 checknetsindiffpair=FALSE checkdiffpairvsdiffpair=TRUE checkxsignals=TRUE checkothers=TRUE
MinimumAnnularRing [All] p1 off: minimumring=0.075
MinimumSolderMaskSliver [All] p1: minsoldermaskwidth=0.1
NetAntennae [All] p1 off: netantennaetolerance=0
PlaneClearance [All] p1: clearance=0.4
PlaneConnect PlaneConnect_Power [InComponentClass('Power_Ties')] p1: pad.planeconnectstyle=Relief pad.reliefexpansion=0.5 pad.reliefentries=4 pad.reliefconductorwidth=0.4 pad.reliefairgap=0.25 via.planeconnectstyle=Direct via.reliefexpansion=0.508 via.reliefentries=4 via.reliefconductorwidth=0.254 via.reliefairgap=0.254 // thicker ties for high power components
PlaneConnect PlaneConnect_Default [All] p2: pad.planeconnectstyle=Relief pad.reliefexpansion=0.3 pad.reliefentries=4 pad.reliefconductorwidth=0.2 pad.reliefairgap=0.2 via.planeconnectstyle=Direct via.reliefexpansion=0.508 via.reliefentries=4 via.reliefconductorwidth=0.254 via.reliefairgap=0.254
PolygonConnect PolygonConnect_Power [InComponentClass('Power_Ties')] p1: thpad.connectstyle=Relief thpad.reliefconductorwidth=0.4 thpad.reliefentries=4 thpad.polygonreliefangle="90 Angle" thpad.airgapwidth=0.25 smdpad.connectstyle=Relief smdpad.reliefconductorwidth=0.4 smdpad.reliefentries=4 smdpad.polygonreliefangle="90 Angle" smdpad.airgapwidth=0.25 via.connectstyle=Direct via.reliefconductorwidth=0.254 via.reliefentries=4 via.polygonreliefangle="90 Angle" via.airgapwidth=0.254
PolygonConnect PolygonConnect_Default [All] p2: connectstyle=Direct reliefconductorwidth=0.25 reliefentries=4 polygonreliefangle="90 Angle" airgapwidth=0.25
RoomDefinition LayerMarkers [False] p1: confinementstyle=ConfineIn formatcopy=TRUE lockcomponents=FALSE outline 41.3,6.3 53.1,6.3 53.1,3.4 41.3,3.4
RoutingVias Via_BGA [TouchesRoom('Room_BGA_Fanout')] p1: holewidth=0.3 width=0.6 viastyle="Through Hole" minholewidth=0.2 minwidth=0.45 maxholewidth=0.4 maxwidth=0.7
RoutingVias Via_Diff_Pair [IsDifferentialPair] p2: holewidth=0.4 width=0.7 viastyle="Through Hole" minholewidth=0.2 minwidth=0.45 maxholewidth=0.7 maxwidth=1
RoutingVias Via_Default [All] p3: holewidth=0.7 width=1 viastyle="Through Hole" minholewidth=0.3 minwidth=0.45 maxholewidth=1 maxwidth=1.4
SMDEntry [All] p1: side=TRUE corner=TRUE anyangle=FALSE
SMDToPlane [InNet('GND')] p1: distance=1181102 // Ensures that all ground pads are close to vias
SilkToSilkClearance [All] p1: silktosilkclearance=0.1
SilkToSolderMaskClearance [IsPad] p1: minsilkscreentomaskgap=0.1 clearancetoexposedcopper=TRUE
SolderMaskExpansion SolderMaskExpansion_Vias [IsVia] p1: expansion=0.102 istentingtop=TRUE
SolderMaskExpansion SolderMaskExpansion_Default [All] p2: expansion=0.075 istentingtop=FALSE
UnRoutedNet [Not TouchesRoom('LayerMarkers')] p1: checkbadconnections=TRUE
Width Width_50R [InNetClass('50R')] p1: maxlimit=0.124 minlimit=0.106 preferedwidth=0.124 toplayer_minwidth=0.124 toplayer_maxwidth=0.124 toplayer_prefwidth=0.124 midlayer1_minwidth=0.124 midlayer2_minwidth=0.112 midlayer2_maxwidth=0.112 midlayer2_prefwidth=0.112 midlayer3_maxwidth=0.106 midlayer3_prefwidth=0.106 midlayer4_maxwidth=0.106 midlayer4_prefwidth=0.106 bottomlayer_minwidth=0.124 bottomlayer_maxwidth=0.124 bottomlayer_prefwidth=0.124 impedanceprofiledriven=TRUE impedanceprofileid={50085BF3-BD56-42FC-807D-1CD2B9C56757} impedanceprofilevalue=50.000000 minimp=50.000000 maximp=50.000000 favimp=50.000000
Width Width_BGA [TouchesRoom('Room_BGA_Fanout')] p2: maxlimit=10 minlimit=0.1 preferedwidth=0.2 // allows necking between BGA pads
Width Width_Diff_Pair [IsDifferentialPair] p3: maxlimit=10 minlimit=0.1 preferedwidth=0.2 // stops altium complaining if diff pair tracks are narrow
Width Width_Power [InNetClass('Power')] p4: maxlimit=10 minlimit=0.3 preferedwidth=0.5 // thicker tracks for power nets. Use a blanket or parameter sets to put power traces in the 'Power' net class
Width Width_Default [All] p5: maxlimit=10 minlimit=0.2 preferedwidth=0.4
19 further rules are at their usual default settings.

## Classes and differential pairs
net class 50R: SIG1 SIG2 SIG3 SIG4 SIG5 SIG6
component class NearFieldProbeSet: J1 J2 J3 J4 J5 J6

## Components (designator, comment, footprint, x,y, rotation, side; value= is the part's Value field where it differs from the comment)
J1 "CONSMB003.062-G" CONSMB003.062-G 9.65,87.6 r270 top
J2 "CONSMB003.062-G" CONSMB003.062-G 9.65,74.4 r270 top
J3 "CONSMB003.062-G" CONSMB003.062-G 9.65,61.2 r270 top
J4 "CONSMB003.062-G" CONSMB003.062-G 9.65,48 r270 top
J5 "CONSMB003.062-G" CONSMB003.062-G 9.65,34.8 r270 top
J6 "CONSMB003.062-G" CONSMB003.062-G 9.65,16.2 r270 top
J7 "CONSMB003.062-G" CONSMB003.062-G 9.65,48 r270 top (schematic designator J3)
J8 "CONSMB003.062-G" CONSMB003.062-G 9.65,34.8 r270 top (schematic designator J3)

## Footprints (in the part's own frame and the unit in brackets; to place one, negate y for a bottom-side part, rotate by r counter-clockwise, add the part's x,y. Pads: shape width x height; smd on the part's side, far side on the other; paste and mask are expansions set on the pad)
CONSMB003.062-G [mm] "SMB Socket"
  rect 1.2x5.5 smd: 1(0,0)
  rect 2.5x5.5 smd: 2(-4.25,0) 3(4.25,0)
  rect 2.5x5.5 smd far side: 4(-4.25,0) 5(4.25,0)
  body extent -4.75,-12.27 4.75,2, height 4.36

## Part data
J1 J2 J3 J4 J5 J6 J7 J8: library part CMP-000015-1, "Connector - SMB Socket, straddle mount"

## Free pads (board coordinates)
  round 2 hole 2 unplated: 1(2.5,2.5) 1(2.5,97.5) 1(97.5,2.5) 1(97.5,97.5)
  round 1 smd mask+0.5: 1(23,7.8) 1(23,96) 1(71.4,7.8) 1(71.4,96)
  round 1 smd far side mask+0.5: 1(23,7.8) 1(23,96) 1(71.4,7.8) 1(71.4,96)
  round 0.6 hole 0.6 unplated: 1(24.8,12.1) 1(24.8,52.1) 1(24.8,57.1) 1(24.8,30.7) 1(24.8,20.3) 1(24.8,65.3) 1(24.8,70.3) 1(24.8,78.5) 1(24.8,83.5) 1(24.8,91.7) 1(24.8,38.9) 1(24.8,43.9) 1(49,12.1) 1(49,52.1) 1(49,57.1) 1(49,30.7) 1(49,20.3) 1(49,65.3) 1(49,70.3) 1(49,78.5) 1(49,83.5) 1(49,91.7) 1(49,38.9) 1(49,43.9) 1(73.2,52.1) 1(73.2,57.1) 1(73.2,30.7) 1(73.2,12.1) 1(73.2,20.3) 1(73.2,65.3) 1(73.2,70.3) 1(73.2,78.5) 1(73.2,83.5) 1(73.2,91.7) 1(73.2,38.9) 1(73.2,43.9) 2(23.9,12.1) 2(23.9,52.1) 2(23.9,57.1) 2(23.9,30.7) 2(23.9,20.3) 2(23.9,65.3) 2(23.9,70.3) 2(23.9,78.5) 2(23.9,83.5) 2(23.9,91.7) 2(23.9,38.9) 2(23.9,43.9) 2(48.1,12.1) 2(48.1,52.1) 2(48.1,57.1) 2(48.1,30.7) 2(48.1,20.3) 2(48.1,65.3) 2(48.1,70.3) 2(48.1,78.5) 2(48.1,83.5) 2(48.1,91.7) 2(48.1,38.9) 2(48.1,43.9) 2(72.3,52.1) 2(72.3,57.1) 2(72.3,30.7) 2(72.3,12.1) 2(72.3,20.3) 2(72.3,65.3) 2(72.3,70.3) 2(72.3,78.5) 2(72.3,83.5) 2(72.3,91.7) 2(72.3,38.9) 2(72.3,43.9) 3(23,12.1) 3(23,52.1) 3(23,57.1) 3(23,30.7) 3(23,20.3) 3(23,65.3) 3(23,70.3) 3(23,78.5) 3(23,83.5) 3(23,91.7) 3(23,38.9) 3(23,43.9) 3(47.2,12.1) 3(47.2,52.1) 3(47.2,57.1) 3(47.2,30.7) 3(47.2,20.3) 3(47.2,65.3) 3(47.2,70.3) 3(47.2,78.5) 3(47.2,83.5) 3(47.2,91.7) 3(47.2,38.9) 3(47.2,43.9) 3(71.4,52.1) 3(71.4,57.1) 3(71.4,30.7) 3(71.4,12.1) 3(71.4,20.3) 3(71.4,65.3) 3(71.4,70.3) 3(71.4,78.5) 3(71.4,83.5) 3(71.4,91.7) 3(71.4,38.9) 3(71.4,43.9) 4(22.1,12.1) 4(22.1,52.1) 4(22.1,57.1) 4(22.1,30.7) 4(22.1,20.3) 4(22.1,65.3) 4(22.1,70.3) 4(22.1,78.5) 4(22.1,83.5) 4(22.1,91.7) 4(22.1,38.9) 4(22.1,43.9) 4(46.3,12.1) 4(46.3,52.1) 4(46.3,57.1) 4(46.3,30.7) 4(46.3,20.3) 4(46.3,65.3) 4(46.3,70.3) 4(46.3,78.5) 4(46.3,83.5) 4(46.3,91.7) 4(46.3,38.9) 4(46.3,43.9) 4(70.5,52.1) 4(70.5,57.1) 4(70.5,30.7) 4(70.5,12.1) 4(70.5,20.3) 4(70.5,65.3) 4(70.5,70.3) 4(70.5,78.5) 4(70.5,83.5) 4(70.5,91.7) 4(70.5,38.9) 4(70.5,43.9) 5(21.2,12.1) 5(21.2,52.1) 5(21.2,57.1) 5(21.2,30.7) 5(21.2,20.3) 5(21.2,65.3) 5(21.2,70.3) 5(21.2,78.5) 5(21.2,83.5) 5(21.2,91.7) 5(21.2,38.9) 5(21.2,43.9) 5(45.4,12.1) 5(45.4,52.1) 5(45.4,57.1) 5(45.4,30.7) 5(45.4,20.3) 5(45.4,65.3) 5(45.4,70.3) 5(45.4,78.5) 5(45.4,83.5) 5(45.4,91.7) 5(45.4,38.9) 5(45.4,43.9) 5(69.6,52.1) 5(69.6,57.1) 5(69.6,30.7) 5(69.6,12.1) 5(69.6,20.3) 5(69.6,65.3) 5(69.6,70.3) 5(69.6,78.5) 5(69.6,83.5) 5(69.6,91.7) 5(69.6,38.9) 5(69.6,43.9)

## Via types
v1: diameter 0.45, hole 0.3, Top Layer to Bottom Layer, tented both sides, 4318 vias